# EAGLE board SOT-23-5 breakout (EAGLE 7.7.0)
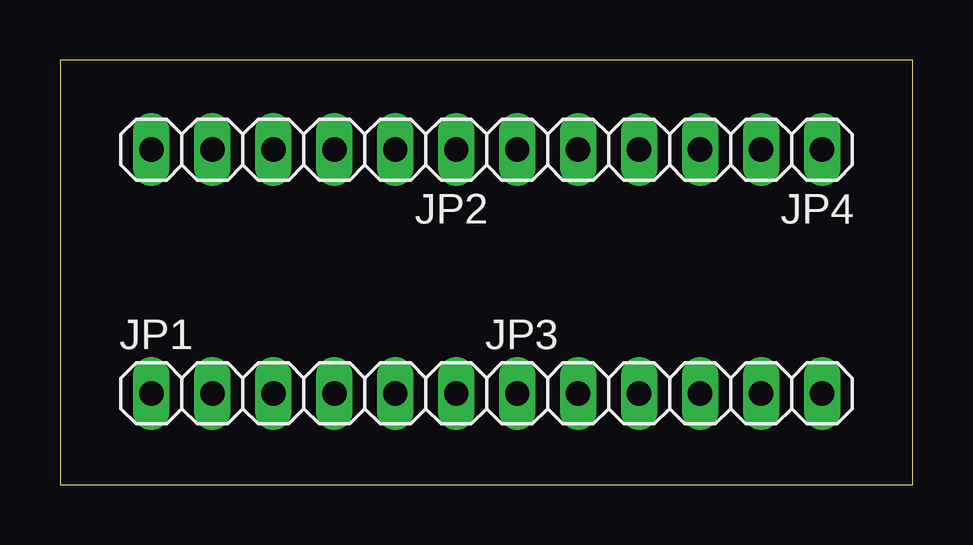
[diagram p0: board, top side]
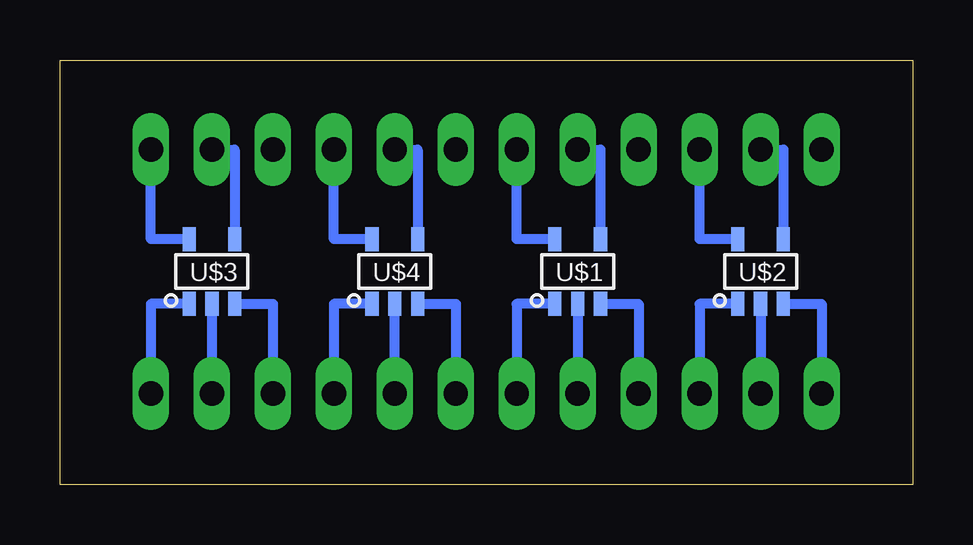
[diagram p1: board, bottom side, seen from below]

Size 35.54 x 17.7 mm. Coordinates in mm from the lower left corner, seen from the top.
Outline: 0,0 35.54,0 35.54,17.7 0,17.7 0,0
Copper layers (1*16): Top 0.035mm / dielectric 1.5mm / Bottom 0.035mm
Design rules "default": minimum track width 10mil, minimum drill 24mil, track to track 8mil, track to pad 8mil, pad to pad 8mil, via to via 8mil, smd to smd 8mil, copper to edge 40mil, drill to drill 8mil, minimum pad ring 10mil, minimum via ring 8mil, stop-mask expansion 4mil, vias tented up to drill 0mil, thermal gap 10mil

## Footprints (pad centres in the part's own frame; a part is rotated, then mirrored left to right if it is on the bottom)
1X06 = drill 1.016 long: 1 -6.35,0; 2 -3.81,0; 3 -1.27,0; 4 1.27,0; 5 3.81,0; 6 6.35,0
SOT-23-5 = smd 1 x 0.55: 1 -1.35,0.95; 2 -1.35,0; 3 -1.35,-0.95; 4 1.35,-0.95; 5 1.35,0.95

## Placement (x,y rotation side)
JP1  [1X06]  10.16,3.81 0 top
JP2  [1X06]  10.16,13.97 180 top
JP3  [1X06]  25.4,3.81 0 top
JP4  [1X06]  25.4,13.97 180 top
U$1  SN74LVC1G06  [SOT-23-5]  13.97,8.89 90 bottom
U$2  SN74LVC1G07  [SOT-23-5]  6.35,8.89 90 bottom
U$3  SN74LVC1G06  [SOT-23-5]  29.21,8.89 90 bottom
U$4  SN74LVC1G07  [SOT-23-5]  21.59,8.89 90 bottom

## Library data of the parts
JP1-JP4 U$1-U$4 = HyTechDevices

## Nets
N$1: JP2.1 U$1.5
N$2: JP2.2 U$1.4
N$3: JP2.4 U$2.5
N$4: JP2.5 U$2.4
N$5: JP1.6 U$1.1
N$6: JP1.5 U$1.2
N$7: JP1.4 U$1.3
N$8: JP1.3 U$2.1
N$9: JP1.2 U$2.2
N$10: JP1.1 U$2.3
N$11: JP4.1 U$3.5
N$12: JP4.2 U$3.4
N$13: JP4.4 U$4.5
N$14: JP4.5 U$4.4
N$15: JP3.6 U$3.1
N$16: JP3.5 U$3.2
N$17: JP3.4 U$3.3
N$18: JP3.3 U$4.1
N$19: JP3.2 U$4.2
N$20: JP3.1 U$4.3

## Tracks (layer width: path | path; a pad name or v marks a point on that pad's centre or on a via)
N$1
  Bottom 0.406: U$1.5 16.51,10.24 JP2.1
N$2
  Bottom 0.406: JP2.2 13.02,13.97 U$1.4
N$3
  Bottom 0.406: U$2.5 8.89,10.24 JP2.4
N$4
  Bottom 0.406: JP2.5 5.4,13.97 U$2.4
N$5
  Bottom 0.406: U$1.1 16.51,7.54 JP1.6
N$6
  Bottom 0.406: U$1.2 JP1.5
N$7
  Bottom 0.406: U$1.3 11.43,7.54 JP1.4
N$8
  Bottom 0.406: U$2.1 8.89,7.54 JP1.3
N$9
  Bottom 0.406: U$2.2 JP1.2
N$10
  Bottom 0.406: U$2.3 3.81,7.54 JP1.1
N$11
  Bottom 0.406: U$3.5 31.75,10.24 JP4.1
N$12
  Bottom 0.406: JP4.2 28.26,13.97 U$3.4
N$13
  Bottom 0.406: U$4.5 24.13,10.24 JP4.4
N$14
  Bottom 0.406: JP4.5 20.64,13.97 U$4.4
N$15
  Bottom 0.406: U$3.1 31.75,7.54 JP3.6
N$16
  Bottom 0.406: U$3.2 JP3.5
N$17
  Bottom 0.406: U$3.3 26.67,7.54 JP3.4
N$18
  Bottom 0.406: U$4.1 24.13,7.54 JP3.3
N$19
  Bottom 0.406: JP3.2 U$4.2
N$20
  Bottom 0.406: U$4.3 19.05,7.54 JP3.1